# EAGLE board fascia_faceInterfaceV0.1 (EAGLE 9.6.0)
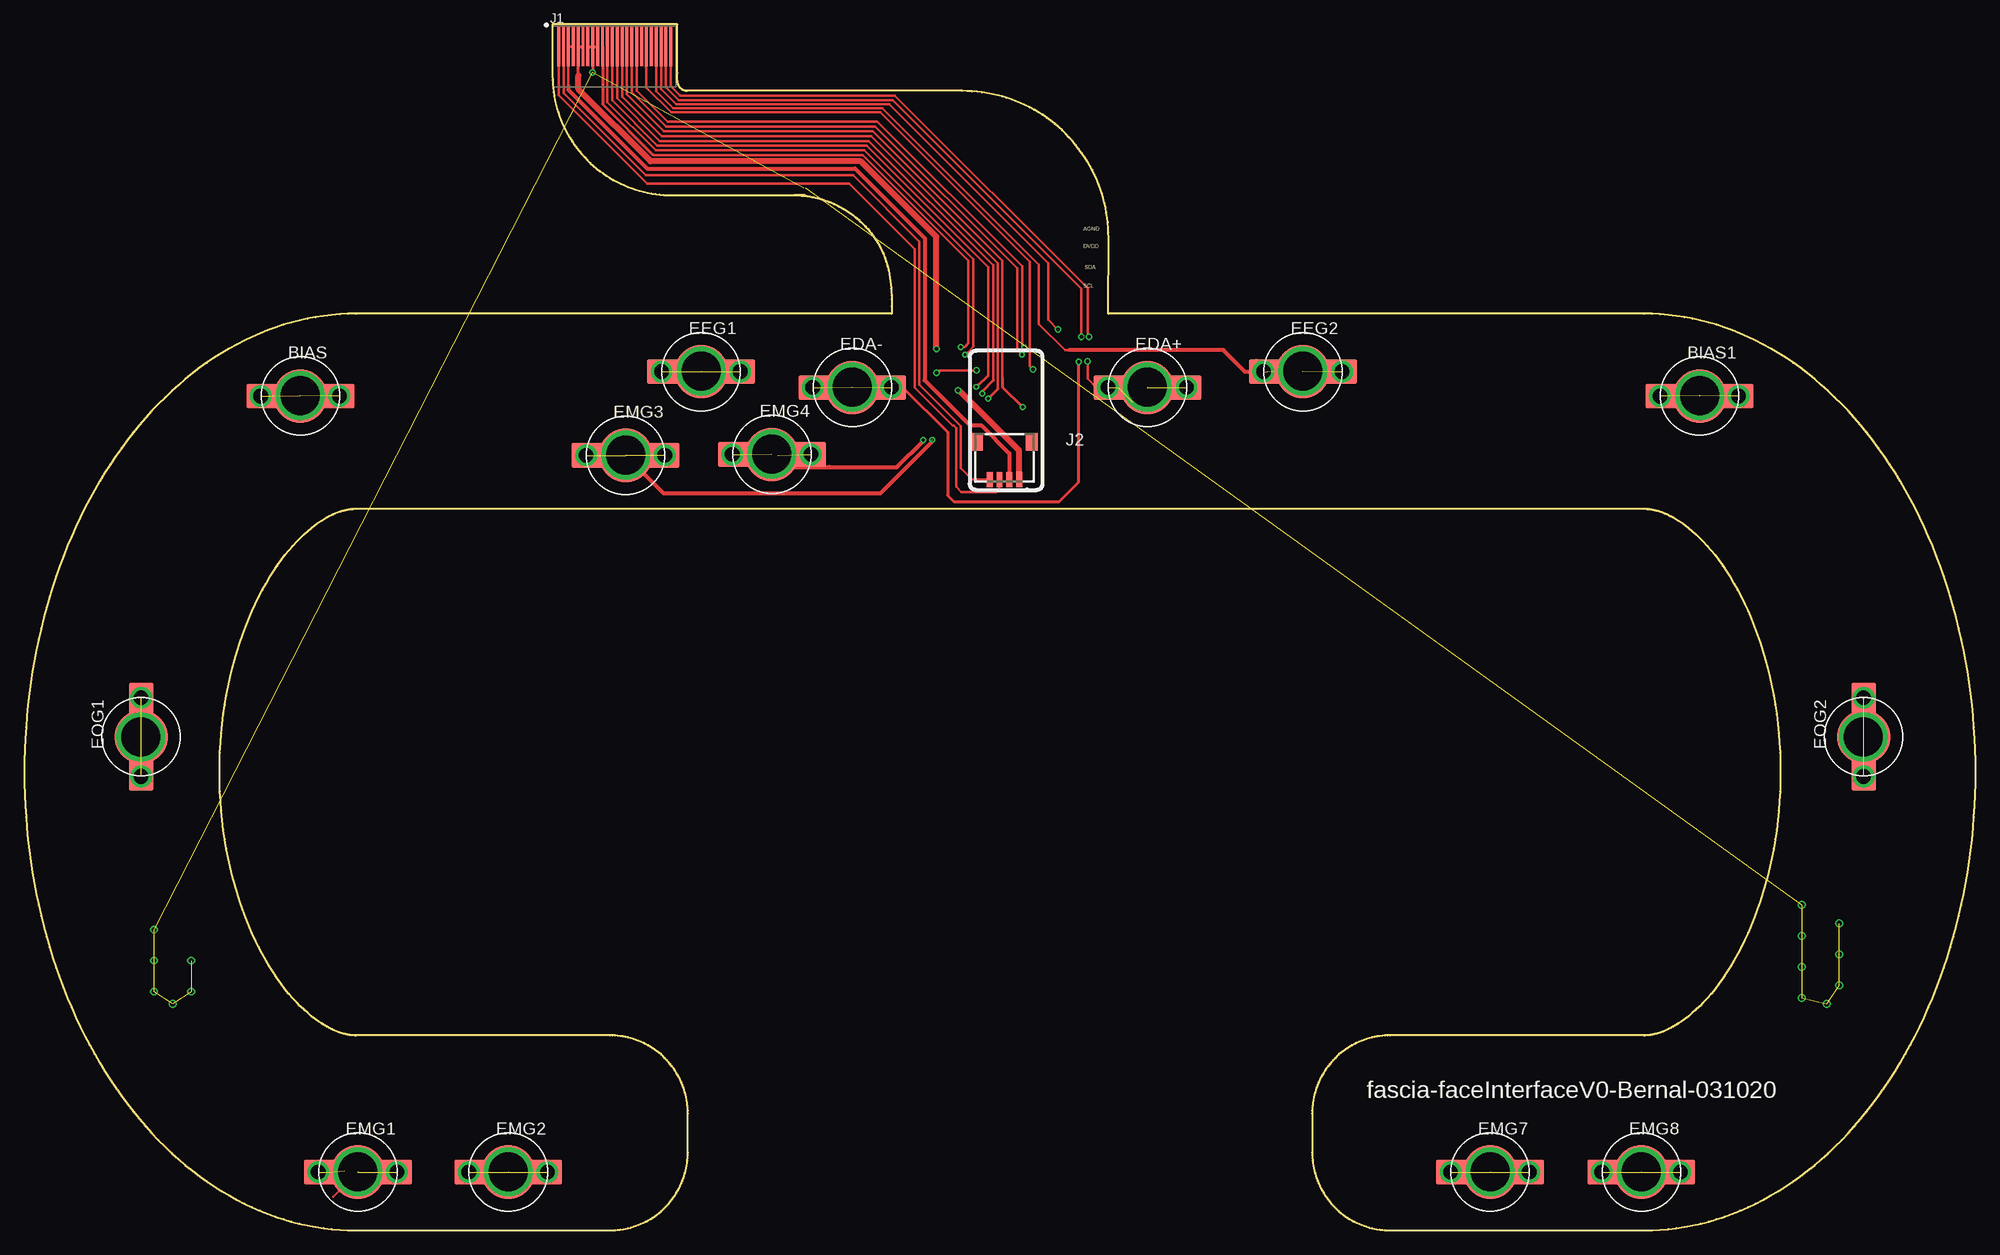
[diagram p0: board, top side]
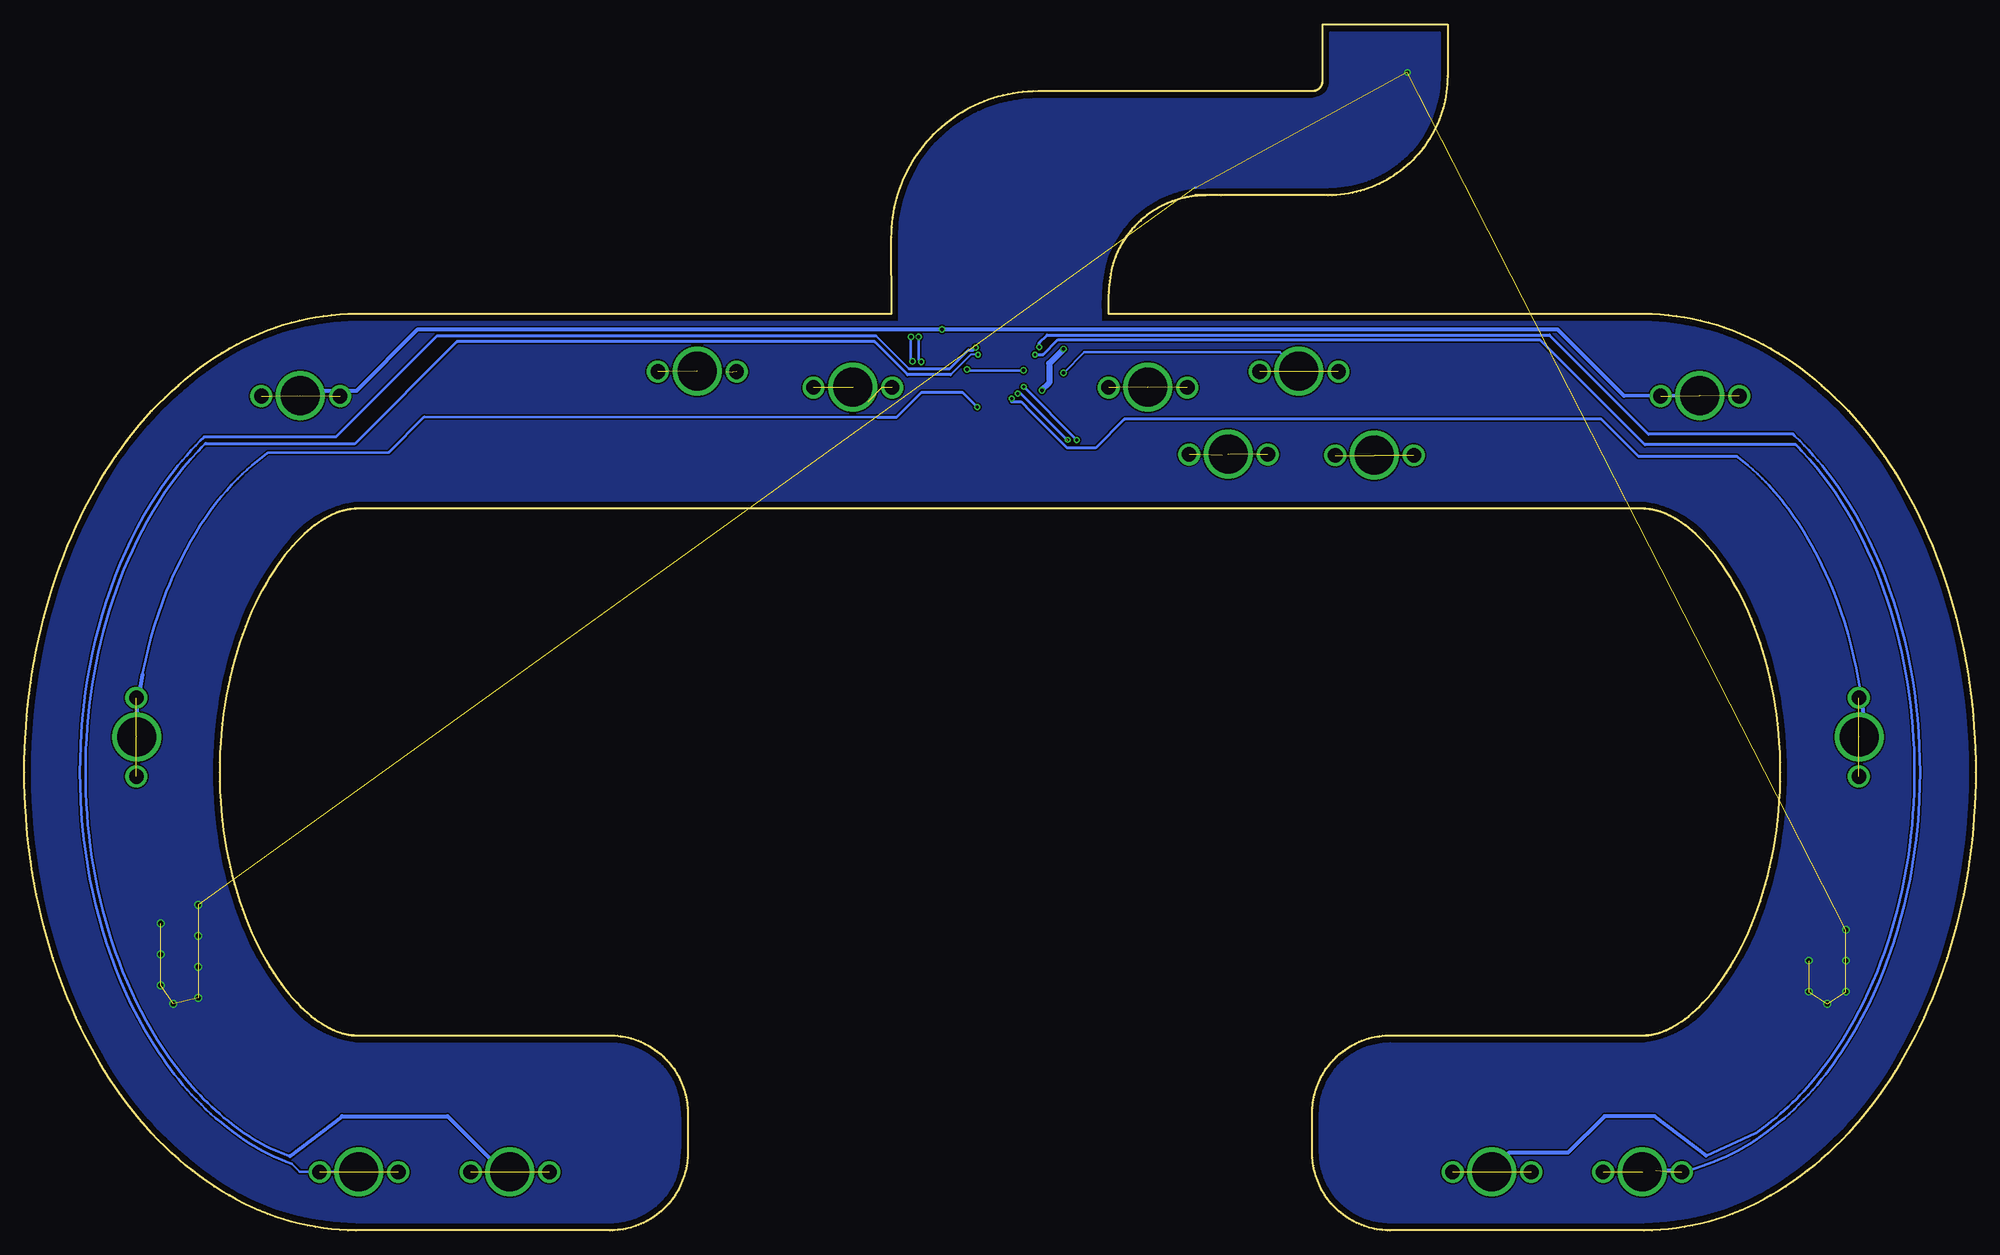
[diagram p1: board, bottom side, seen from below]

Size 200 x 123.67 mm. Coordinates in mm from the lower left corner, seen from the top.
Outline: 78.89,106.14 77.35,106.14 66.37,106.14 65.95,106.15 65.53,106.17 65.12,106.21 64.7,106.26 64.29,106.32 63.88,106.4 63.47,106.49 63.07,106.6 62.67,106.72 62.27,106.85 61.88,107 61.49,107.16 61.11,107.33 60.74,107.52 60.37,107.71 60.01,107.93 59.66,108.15 59.31,108.38 58.97,108.63 58.65,108.89 58.33,109.16 58.02,109.44 57.72,109.73 57.43,110.03 57.15,110.34 56.88,110.66 56.62,110.99 56.37,111.32 56.14,111.67 55.91,112.02 55.7,112.38 55.5,112.75 55.32,113.13 55.14,113.51 54.98,113.89 54.84,114.28 54.7,114.68 54.59,115.08 54.48,115.48 54.39,115.89 54.31,116.3 54.25,116.72 54.2,117.13 54.16,117.55 54.14,117.96 54.13,118.38 54.13,123.67 66.93,123.67 66.93,118.67 66.93,117.86 66.93,117.84 66.94,117.81 66.94,117.79 66.94,117.76 66.94,117.74 66.95,117.72 66.95,117.69 66.95,117.67 66.96,117.64 66.96,117.62 66.97,117.6 66.98,117.57 66.98,117.55 66.99,117.53 67,117.51 67.01,117.48 67.02,117.46 67.03,117.44 67.04,117.42 67.05,117.4 67.06,117.38 67.07,117.36 67.09,117.33 67.1,117.31 67.11,117.29 67.13,117.27 67.14,117.25 67.16,117.23 67.17,117.22 67.19,117.2 67.21,117.18 67.22,117.16 67.24,117.14 67.26,117.12 67.28,117.11 67.3,117.09 67.32,117.07 67.34,117.06 67.36,117.04 67.38,117.03 67.4,117.01 67.42,117 67.44,116.99 67.46,116.98 67.48,116.96 67.5,116.95 67.52,116.94 67.54,116.93 67.57,116.92 67.59,116.91 67.61,116.9 67.64,116.9 67.66,116.89 67.68,116.88 67.71,116.88 67.73,116.87 67.75,116.87 67.78,116.86 67.8,116.86 67.83,116.85 67.85,116.85 67.88,116.85 67.91,116.85 67.93,116.84 96.13,116.84 96.64,116.84 97.15,116.81 97.66,116.77 98.17,116.7 98.68,116.63 99.18,116.53 99.68,116.42 100.18,116.29 100.67,116.14 101.16,115.98 101.64,115.8 102.11,115.6 102.58,115.39 103.04,115.16 103.49,114.91 103.93,114.66 104.37,114.38 104.79,114.09 105.2,113.79 105.61,113.47 106,113.14 106.38,112.8 106.75,112.44 107.1,112.07 107.45,111.69 107.78,111.3 108.09,110.89 108.39,110.48 108.68,110.05 108.96,109.62 109.21,109.18 109.46,108.73 109.68,108.27 109.9,107.8 110.09,107.32 110.27,106.84 110.43,106.36 110.58,105.87 110.71,105.37 110.82,104.87 110.92,104.37 110.99,103.86 111.05,103.35 111.1,102.84 111.12,102.33 111.13,101.81 111.11,94 166,94 166.84,93.99 167.67,93.94 168.51,93.87 169.34,93.77 170.17,93.65 171,93.49 171.82,93.31 172.63,93.1 173.46,92.86 174.27,92.59 175.07,92.29 175.87,91.98 176.67,91.62 177.46,91.25 178.24,90.85 179.01,90.42 179.79,89.96 180.55,89.48 181.3,88.98 182.03,88.45 182.77,87.89 183.49,87.3 184.2,86.7 184.89,86.08 185.59,85.42 186.26,84.74 186.93,84.04 187.57,83.33 188.22,82.58 188.84,81.81 189.45,81.03 190.04,80.23 190.63,79.4 191.2,78.55 191.75,77.69 192.28,76.81 192.81,75.9 193.31,74.98 193.8,74.05 194.27,73.11 194.73,72.13 195.17,71.15 195.58,70.16 195.98,69.15 196.37,68.12 196.74,67.08 197.09,66.04 197.41,64.99 197.72,63.91 198.01,62.83 198.29,61.74 198.54,60.64 198.77,59.53 198.98,58.41 199.17,57.29 199.34,56.17 199.5,55.03 199.63,53.89 199.74,52.75 199.84,51.61 199.91,50.46 199.96,49.31 199.99,48.15 200,47 199.99,45.85 199.96,44.69 199.91,43.54 199.84,42.39 199.74,41.25 199.63,40.11 199.5,38.97 199.34,37.83 199.17,36.71 198.98,35.59 198.77,34.47 198.54,33.36 198.29,32.26 198.01,31.17 197.72,30.09 197.41,29.01 197.09,27.96 196.74,26.92 196.37,25.88 195.98,24.85 195.58,23.84 195.17,22.85 194.73,21.87 194.27,20.89 193.8,19.95 193.31,19.02 192.81,18.1 192.28,17.19 191.75,16.31 191.2,15.45 190.63,14.6 190.04,13.77 189.45,12.97 188.84,12.19 188.22,11.42 187.57,10.67 186.93,9.96 186.26,9.26 185.59,8.58 184.89,7.92 184.2,7.3 183.49,6.7 182.77,6.11 182.03,5.55 181.3,5.02 180.55,4.52 179.79,4.04 179.01,3.58 178.24,3.15 177.46,2.75 176.67,2.38 175.87,2.02 175.07,1.71 174.27,1.41 173.46,1.14 172.63,0.9 171.82,0.69 171,0.51 170.17,0.35 169.34,0.23 168.51,0.13 167.67,0.06 166.84,0.01 166,0 140,0 139.73,0 139.45,0.02 139.18,0.04 138.91,0.07 138.64,0.12 138.37,0.17 138.11,0.23 137.84,0.3 137.58,0.37 137.32,0.46 137.07,0.56 136.81,0.66 136.56,0.78 136.32,0.9 136.08,1.03 135.84,1.16 135.61,1.31 135.39,1.46 135.17,1.63 134.95,1.79 134.74,1.97 134.54,2.15 134.34,2.34 134.15,2.54 133.97,2.74 133.79,2.95 133.63,3.17 133.46,3.39 133.31,3.61 133.16,3.84 133.03,4.08 132.9,4.32 132.78,4.56 132.66,4.81 132.56,5.07 132.46,5.32 132.38,5.58 132.3,5.84 132.23,6.11 132.17,6.37 132.12,6.64 132.07,6.91 132.04,7.18 132.02,7.45 132,7.73 132,8 132,12 132,12.27 132.02,12.55 132.04,12.82 132.07,13.09 132.12,13.36 132.17,13.63 132.23,13.89 132.3,14.16 132.38,14.42 132.46,14.68 132.56,14.93 132.66,15.19 132.78,15.44 132.9,15.68 133.03,15.92 133.16,16.16 133.31,16.39 133.46,16.61 133.63,16.83 133.79,17.05 133.97,17.26 134.15,17.46 134.34,17.66 134.54,17.85 134.74,18.03 134.95,18.21 135.17,18.37 135.39,18.54 135.61,18.69 135.84,18.84 136.08,18.97 136.32,19.1 136.56,19.22 136.81,19.34 137.07,19.44 137.32,19.54 137.58,19.63 137.84,19.7 138.11,19.77 138.37,19.83 138.64,19.88 138.91,19.93 139.18,19.96 139.45,19.98 139.73,20 140,20 166,20 166.1,20 166.2,20 166.3,20.01 166.4,20.02 166.5,20.03 166.6,20.04 166.7,20.05 166.8,20.07 166.91,20.09 167.02,20.11 167.13,20.13 167.24,20.16 167.35,20.19 167.47,20.23 167.6,20.27 167.72,20.31 167.85,20.36 167.99,20.41 168.12,20.46 168.25,20.52 168.39,20.58 168.54,20.65 168.68,20.72 168.83,20.8 169.01,20.9 169.2,21.01 169.37,21.11 169.54,21.22 169.86,21.44 170.04,21.56 170.22,21.7 170.57,21.97 170.95,22.28 171.32,22.61 171.71,22.99 172.09,23.38 172.5,23.81 172.88,24.26 173.29,24.76 173.68,25.27 174.08,25.83 174.46,26.4 174.86,27.02 175.23,27.66 175.61,28.33 175.97,29.02 176.34,29.77 176.69,30.53 177.02,31.29 177.33,32.07 177.64,32.9 177.94,33.75 178.21,34.6 178.46,35.46 178.7,36.36 178.92,37.27 179.12,38.2 179.3,39.14 179.46,40.11 179.6,41.08 179.72,42.05 179.82,43.03 179.9,44.02 179.95,45.01 179.99,46 180,47 179.99,48 179.95,48.99 179.9,49.98 179.82,50.97 179.72,51.96 179.6,52.93 179.46,53.9 179.3,54.86 179.12,55.8 178.92,56.73 178.7,57.64 178.46,58.54 178.2,59.41 177.93,60.28 177.64,61.11 177.33,61.93 177.01,62.72 176.68,63.5 176.33,64.24 175.97,64.98 175.61,65.67 175.23,66.34 174.86,66.98 174.46,67.6 174.08,68.17 173.68,68.73 173.29,69.24 172.88,69.74 172.5,70.19 172.09,70.62 171.71,71.01 171.32,71.39 170.95,71.72 170.57,72.03 170.22,72.3 170.04,72.44 169.86,72.56 169.54,72.78 169.37,72.89 169.2,72.99 169.01,73.1 168.83,73.2 168.69,73.27 168.56,73.34 168.42,73.41 168.28,73.47 168.14,73.53 168,73.59 167.86,73.64 167.72,73.69 167.6,73.73 167.48,73.77 167.36,73.81 167.24,73.84 167.13,73.87 167.02,73.89 166.91,73.91 166.8,73.93 166.7,73.95 166.6,73.96 166.5,73.97 166.4,73.98 166.3,73.99 166.2,74 166.1,74 166,74 34,74 33.9,74 33.8,74 33.7,73.99 33.6,73.98 33.5,73.97 33.4,73.96 33.3,73.95 33.2,73.93 33.09,73.91 32.98,73.89 32.87,73.87 32.76,73.84 32.64,73.8 32.53,73.77 32.4,73.73 32.28,73.69 32.15,73.64 32.02,73.59 31.88,73.54 31.75,73.48 31.61,73.42 31.46,73.35 31.32,73.28 31.18,73.2 30.99,73.1 30.8,72.99 30.63,72.89 30.47,72.78 30.14,72.56 29.96,72.44 29.78,72.3 29.43,72.03 29.05,71.72 28.68,71.39 28.29,71.01 27.91,70.62 27.5,70.19 27.12,69.74 26.71,69.24 26.32,68.73 25.92,68.17 25.54,67.6 25.15,66.98 24.77,66.34 24.39,65.67 24.03,64.98 23.66,64.23 23.31,63.47 22.98,62.71 22.67,61.93 22.36,61.1 22.06,60.25 21.79,59.4 21.54,58.54 21.3,57.64 21.08,56.73 20.88,55.8 20.7,54.86 20.54,53.89 20.4,52.92 20.28,51.95 20.18,50.97 20.1,49.98 20.05,48.99 20.01,48 20,47 20.01,46 20.05,45.01 20.1,44.02 20.18,43.03 20.28,42.04 20.4,41.07 20.54,40.1 20.7,39.14 20.88,38.2 21.08,37.27 21.3,36.36 21.54,35.46 21.8,34.59 22.07,33.72 22.36,32.89 22.67,32.07 22.99,31.28 23.33,30.5 23.67,29.76 24.03,29.02 24.39,28.33 24.77,27.66 25.15,27.02 25.54,26.4 25.92,25.83 26.32,25.27 26.71,24.76 27.12,24.26 27.5,23.81 27.91,23.38 28.29,22.99 28.68,22.61 29.05,22.28 29.43,21.97 29.78,21.7 29.96,21.56 30.14,21.44 30.47,21.22 30.63,21.11 30.8,21.01 30.99,20.9 31.18,20.8 31.31,20.73 31.44,20.66 31.58,20.59 31.72,20.53 31.86,20.47 32,20.41 32.14,20.36 32.28,20.31 32.4,20.27 32.52,20.23 32.64,20.19 32.76,20.16 32.87,20.13 32.98,20.11 33.09,20.09 33.2,20.07 33.3,20.05 33.4,20.04 33.5,20.03 33.6,20.02 33.7,20.01 33.8,20 33.9,20 34,20 60,20 60.27,20 60.55,19.98 60.82,19.96 61.09,19.93 61.36,19.88 61.63,19.83 61.89,19.77 62.16,19.7 62.42,19.63 62.68,19.54 62.94,19.44 63.19,19.34 63.44,19.22 63.68,19.1 63.92,18.97 64.16,18.84 64.39,18.69 64.61,18.54 64.83,18.37 65.05,18.21 65.26,18.03 65.46,17.85 65.66,17.66 65.85,17.46 66.03,17.26 66.21,17.05 66.37,16.83 66.54,16.61 66.69,16.39 66.84,16.16 66.97,15.92 67.1,15.68 67.22,15.44 67.34,15.19 67.44,14.93 67.54,14.68 67.63,14.42 67.7,14.16 67.77,13.89 67.83,13.63 67.88,13.36 67.93,13.09 67.96,12.82 67.98,12.55 68,12.27 68,12 68,8 68,7.73 67.98,7.45 67.96,7.18 67.93,6.91 67.88,6.64 67.83,6.37 67.77,6.11 67.7,5.84 67.63,5.58 67.54,5.32 67.44,5.07 67.34,4.81 67.22,4.56 67.1,4.32 66.97,4.08 66.84,3.84 66.69,3.61 66.54,3.39 66.37,3.17 66.21,2.95 66.03,2.74 65.85,2.54 65.66,2.34 65.46,2.15 65.26,1.97 65.05,1.79 64.83,1.63 64.61,1.46 64.39,1.31 64.16,1.16 63.92,1.03 63.68,0.9 63.44,0.78 63.19,0.66 62.94,0.56 62.68,0.46 62.42,0.37 62.16,0.3 61.89,0.23 61.63,0.17 61.36,0.12 61.09,0.07 60.82,0.04 60.55,0.02 60.27,0 60,0 34,0 33.16,0.01 32.33,0.06 31.49,0.13 30.66,0.23 29.83,0.35 29,0.51 28.18,0.69 27.37,0.9 26.54,1.14 25.73,1.41 24.93,1.71 24.13,2.02 23.33,2.38 22.54,2.75 21.76,3.15 20.99,3.58 20.21,4.04 19.45,4.52 18.71,5.02 17.97,5.55 17.23,6.11 16.51,6.7 15.8,7.3 15.11,7.92 14.41,8.58 13.74,9.26 13.07,9.96 12.43,10.67 11.78,11.42 11.16,12.19 10.55,12.97 9.96,13.77 9.37,14.6 8.8,15.45 8.25,16.31 7.72,17.19 7.19,18.1 6.69,19.02 6.2,19.95 5.73,20.89 5.27,21.87 4.83,22.85 4.42,23.84 4.02,24.85 3.63,25.88 3.26,26.92 2.91,27.96 2.59,29.01 2.28,30.09 1.99,31.17 1.72,32.26 1.47,33.36 1.23,34.47 1.02,35.59 0.83,36.71 0.66,37.83 0.5,38.97 0.37,40.11 0.26,41.25 0.17,42.39 0.09,43.54 0.04,44.69 0.01,45.85 0,47 0.01,48.15 0.04,49.31 0.09,50.46 0.17,51.61 0.26,52.75 0.37,53.89 0.5,55.03 0.66,56.17 0.83,57.29 1.02,58.41 1.23,59.53 1.47,60.64 1.72,61.74 1.99,62.83 2.28,63.91 2.59,64.99 2.91,66.04 3.26,67.08 3.63,68.12 4.02,69.15 4.42,70.16 4.83,71.15 5.27,72.13 5.73,73.11 6.2,74.05 6.69,74.98 7.19,75.9 7.72,76.81 8.25,77.69 8.8,78.55 9.37,79.4 9.96,80.23 10.55,81.03 11.16,81.81 11.78,82.58 12.43,83.33 13.07,84.04 13.74,84.74 14.41,85.42 15.11,86.08 15.8,86.7 16.51,87.3 17.23,87.89 17.97,88.45 18.71,88.98 19.45,89.48 20.21,89.96 20.99,90.42 21.76,90.85 22.54,91.25 23.33,91.62 24.13,91.98 24.93,92.29 25.73,92.59 26.54,92.86 27.37,93.1 28.18,93.31 29,93.49 29.83,93.65 30.66,93.77 31.49,93.87 32.33,93.94 33.16,93.99 34,94 88.89,94 88.9,94.74 88.9,95.49 88.88,95.86 88.87,96.23 88.84,96.61 88.81,96.98 88.76,97.35 88.71,97.72 88.65,98.08 88.58,98.44 88.49,98.8 88.44,98.98 88.39,99.16 88.34,99.34 88.28,99.51 88.22,99.69 88.16,99.86 88.09,100.03 88.02,100.2 87.94,100.37 87.86,100.54 87.78,100.7 87.7,100.87 87.61,101.03 87.52,101.19 87.42,101.35 87.32,101.51 87.22,101.66 87.12,101.82 87.01,101.97 86.9,102.12 86.79,102.27 86.67,102.41 86.55,102.56 86.43,102.7 86.31,102.84 86.18,102.98 86.05,103.11 85.92,103.24 85.79,103.37 85.65,103.5 85.51,103.63 85.37,103.75 85.23,103.87 85.08,103.98 84.93,104.1 84.78,104.21 84.63,104.32 84.48,104.42 84.32,104.53 84.17,104.63 84.01,104.72 83.85,104.82 83.68,104.91 83.52,105 83.35,105.08 83.19,105.16 83.02,105.24 82.85,105.32 82.68,105.39 82.51,105.46 82.33,105.53 82.16,105.59 81.98,105.65 81.81,105.7 81.63,105.76 81.45,105.81 81.27,105.85 81.09,105.9 80.91,105.94 80.73,105.97 80.55,106 80.36,106.03 80.18,106.06 80,106.08 79.81,106.1 79.63,106.12 79.45,106.13 79.26,106.14 79.08,106.14 78.89,106.14
Outline: 78.89,106.14 79.9,106.14 79.92,106.14
Outline: 79.92,106.14 80,106.14
Outline: 80,106.14 80.02,106.14
Outline: 80.02,106.14 80.03,106.14
Outline: 80.03,106.14 80.03,106.14
Outline: 80.03,106.14 80.03,106.14
Outline: 80.03,106.14 80.03,106.14
Outline: 80.03,106.14 80.02,106.14
Outline: 80.02,106.14 80,106.14
Outline: 80,106.14 79.92,106.14
Outline: 79.92,106.14 78.89,106.14
Copper layers (1*16): Top 0.035mm / dielectric 1.5mm / Bottom 0.035mm
Design rules "SparkFun-2-layer-PCBWay-LIMIT": minimum track width 6mil, minimum drill 0.3mm, track to track 6mil, track to pad 6mil, pad to pad 6mil, via to via 6mil, smd to smd 6mil, copper to edge 6mil, drill to drill 6mil, minimum pad ring 6mil, minimum via ring 6mil, stop-mask expansion 4mil, vias tented up to drill 25mil, thermal gap 10mil
Net classes: 0 default: width 0.19 mm, drill 0.19 mm

## Footprints (pad centres in the part's own frame; a part is rotated, then mirrored left to right if it is on the bottom)
ELECTRODE_V2 = drill 4 pad 4.1: , 0,0.04 | smd 5.5 x 5.5: . 0,0 | drill 1.5 pad 1.676: P$1 -4.056,0; P$2 4.009,0 | smd 5.08 x 2.54: P$3 -3,0; P$4 3,0
MOLEX_52437-2471_FLEX = smd 0.3 x 4: 1 0.15,2; 2 0.65,2; 3 1.15,2; 4 1.65,2; 5 2.15,2; 6 2.65,2; 7 3.15,2; 8 3.65,2; 9 4.15,2; 10 4.65,2; 11 5.15,2; 12 5.65,2; 13 6.15,2; 14 6.65,2; 15 7.15,2; 16 7.65,2; 17 8.15,2; 18 8.65,2; 19 9.15,2; 20 9.65,2; 21 10.15,2; 22 10.65,2; 23 11.15,2; 24 11.65,2
SM04B-SRSS-TB(LFSN) = smd 0.6 x 1.55: 1 1.5,4.661; 2 2.5,4.661; 3 3.5,4.661; 4 4.5,4.661 | smd 1.2 x 1.8: 5 0.2,0.786; 6 5.8,0.786

## Placement (x,y rotation side)
BIAS  ELECTRODE-8MMELECTRODE_8MM  [ELECTRODE_V2]  28.28,85.56 0 top
BIAS1  ELECTRODE-8MMELECTRODE_8MM  [ELECTRODE_V2]  171.7,85.56 0 top
EDA+  ELECTRODE-8MMELECTRODE_8MM  [ELECTRODE_V2]  115.11,86.44 0 top
EDA-  ELECTRODE-8MMELECTRODE_8MM  [ELECTRODE_V2]  84.86,86.44 0 top
EEG1  ELECTRODE-8MMELECTRODE_8MM  [ELECTRODE_V2]  69.36,88.06 0 top
EEG2  ELECTRODE-8MMELECTRODE_8MM  [ELECTRODE_V2]  131.05,88.06 0 top
EMG1  ELECTRODE-8MMELECTRODE_8MM  [ELECTRODE_V2]  34.18,5.98 0 top
EMG2  ELECTRODE-8MMELECTRODE_8MM  [ELECTRODE_V2]  49.6,5.98 0 top
EMG3  ELECTRODE-8MMELECTRODE_8MM  [ELECTRODE_V2]  61.63,79.48 0 top
EMG4  ELECTRODE-8MMELECTRODE_8MM  [ELECTRODE_V2]  76.61,79.58 0 top
EMG7  ELECTRODE-8MMELECTRODE_8MM  [ELECTRODE_V2]  150.24,5.98 0 top
EMG8  ELECTRODE-8MMELECTRODE_8MM  [ELECTRODE_V2]  165.73,5.98 0 top
EOG1  ELECTRODE-8MMELECTRODE_8MM  [ELECTRODE_V2]  11.97,50.61 90 top
EOG2  ELECTRODE-8MMELECTRODE_8MM  [ELECTRODE_V2]  188.53,50.61 90 top
J1  MOLEX_52437-247_FLEX  [MOLEX_52437-2471_FLEX]  54.61,119.38 0 top
J2  SM04B-SRSS-TB(LF)(SN)  [SM04B-SRSS-TB(LFSN)]  103.46,81.63 180 top

## Library data of the parts
BIAS BIAS1 EDA+ EDA- EEG1 EEG2 EMG1-EMG4 EMG7 EMG8 EOG1 EOG2 = novaXR
J1 = Molex - 52437-2471
J2 = SamacSys_Parts; DESCRIPTION: JST (JAPAN SOLDERLESS TERMINALS) - SM04B-SRSS-TB(LF)(SN) - CONNECTOR, HEADER, SMT, R/A, 1MM, 4WAY; HEIGHT: mm; MANUFACTURER_NAME: JST (JAPAN SOLDERLESS TERMINALS); MANUFACTURER_PART_NUMBER: SM04B-SRSS-TB(LF)(SN)

## Nets
1N: EMG2., EMG2.. EMG2.P$1 EMG2.P$2 EMG2.P$3 EMG2.P$4 J1.11
1P: EMG1., EMG1.. EMG1.P$1 EMG1.P$2 EMG1.P$3 EMG1.P$4 J1.10
2N: EMG3., EMG3.. EMG3.P$1 EMG3.P$2 EMG3.P$3 EMG3.P$4 J1.13
2P: EMG4., EMG4.. EMG4.P$1 EMG4.P$2 EMG4.P$3 EMG4.P$4 J1.12
3N: EOG2., EOG2.. EOG2.P$1 EOG2.P$2 EOG2.P$3 EOG2.P$4 J1.15
3P: EOG1., EOG1.. EOG1.P$1 EOG1.P$2 EOG1.P$3 EOG1.P$4 J1.14
4N: EMG8., EMG8.. EMG8.P$1 EMG8.P$2 EMG8.P$3 EMG8.P$4 J1.17
4P: EMG7., EMG7.. EMG7.P$1 EMG7.P$2 EMG7.P$3 EMG7.P$4 J1.16
5N: EEG1., EEG1.. EEG1.P$1 EEG1.P$2 EEG1.P$3 EEG1.P$4 J1.19
5P: J1.18
6N: EEG2., EEG2.. EEG2.P$1 EEG2.P$2 EEG2.P$3 EEG2.P$4 J1.21
6P: J1.20
AGND: J1.7 J1.8 J1.9
BIAS: BIAS1., BIAS1.. BIAS1.P$1 BIAS1.P$2 BIAS1.P$3 BIAS1.P$4 BIAS., BIAS.. BIAS.P$1 BIAS.P$2 BIAS.P$3 BIAS.P$4 J1.22
DVDD: J1.3 J1.4 J2.2
EDA+: EDA+., EDA+.. EDA+.P$1 EDA+.P$2 EDA+.P$3 EDA+.P$4 J1.24
EDA-: EDA-., EDA-.. EDA-.P$1 EDA-.P$2 EDA-.P$3 EDA-.P$4 J1.23
GND: J1.5 J1.6 J2.1
S0_I2C_SCL: J1.2 J2.4
S0_I2C_SDA: J1.1 J2.3

## Tracks (layer width: path | path; a pad name or v marks a point on that pad's centre or on a via)
1N  (via drill 0.3)  (5 unrouted)
  Top 0.25: 97.26,95.14 97.26,90.61 96.73,90.08
  Top 0.254: 96.73,90.08 96.46,89.81 v96.41,89.81 | 97.26,95.14 97.26,99.58 86.1,110.74 64.7,110.74 59.76,115.68 J1.11
  Bottom 0.25: 18.35,80.5 18.19,80.34 17.81,79.93 17.06,79.11 16.35,78.27 15.66,77.4 14.99,76.51 14.36,75.6 13.75,74.67 13.17,73.72 12.61,72.76 12.08,71.78 11.57,70.79 11.09,69.79 10.63,68.77 10.2,67.75 9.79,66.72 9.41,65.67 9.04,64.62 8.71,63.56 8.39,62.5 8.1,61.43 7.82,60.35 7.58,59.26 7.35,58.18 7.14,57.08 6.96,55.99 6.8,54.89 6.66,53.78 6.54,52.68 6.44,51.57 6.37,50.46 6.31,49.35 6.28,48.24 6.27,47.13 6.27,46.02 6.3,44.91 6.35,43.8 6.43,42.69 6.52,41.58 6.63,40.47 6.77,39.37 6.92,38.27 7.1,37.17 7.3,36.08 7.52,34.99 7.76,33.91 8.03,32.83 8.32,31.75 8.63,30.69 8.96,29.63 9.32,28.57 9.7,27.53 10.1,26.49 10.53,25.47 10.98,24.45 11.46,23.44 11.96,22.45 12.48,21.47 13.03,20.5 13.61,19.55 14.21,18.62 14.84,17.71 15.5,16.81 16.18,15.94 16.89,15.08 17.63,14.26 18.01,13.85 18.4,13.45 18.8,13.06 19.2,12.68 19.61,12.3 20.02,11.93 20.45,11.57 20.88,11.22 21.29,10.89 21.71,10.58 22.13,10.27 22.56,9.97 22.59,9.95 27.61,7.66
  Bottom 0.305: v96.41,89.81 95.59,89.81 94.06,91.34 44.66,91.34 33.89,80.57 18.43,80.57 18.35,80.5
  Bottom 0.406: 27.61,7.66 32.91,11.72 38.03,11.72 41.76,7.99 47.78,7.99 47.95,7.81 47.95,7.49 EMG2.,
1P  (via drill 0.3)  (5 unrouted)
  Top 0.203: 96.42,90.65 96.34,90.56 v95.97,90.56
  Top 0.25: 96.42,90.65 96.74,90.97 96.74,94.99 96.74,95.14 | 31.64,3.44 EMG1.,
  Top 0.254: 96.74,94.99 96.73,95 | 96.74,95.14 96.74,99.45 85.91,110.28 64.48,110.28
  Top 0.305: J1.10 59.26,115.49 64.48,110.28
  Bottom 0.25: 29.42,6.1 26.83,7.04 26.27,7.27 25.63,7.55 25,7.85 24.38,8.18 23.77,8.52 23.17,8.88 22.58,9.26 22.01,9.65 21.44,10.06 20.79,10.55 20.16,11.06 19.64,11.51 19.12,11.97 18.61,12.44 18.12,12.93 17.64,13.42 17.16,13.92 16.7,14.43 16.25,14.95 15.81,15.48 15.39,16.02 14.97,16.56 14.56,17.12 14.16,17.68 13.77,18.24 13.03,19.4 12.32,20.59 11.65,21.79 11.02,23.02 10.43,24.27 9.88,25.53 9.36,26.8 8.88,28.09 8.44,29.39 8.03,30.7 7.65,32.02 7.31,33.35 7,34.69 6.72,36.03 6.48,37.39 6.27,38.74 6.1,40.1 5.95,41.47 5.84,42.84 5.76,44.21 5.71,45.58 5.69,46.95 5.71,48.32 5.75,49.69 5.83,51.06 5.94,52.42 6.08,53.78 6.26,55.14 6.46,56.49 6.7,57.84 6.97,59.18 7.28,60.52 7.61,61.84 7.99,63.17 8.4,64.49 8.84,65.79 9.32,67.08 9.83,68.36 10.38,69.61 10.96,70.86 11.59,72.08 12.25,73.29 12.96,74.48 13.7,75.65 14.09,76.22 14.49,76.78 14.89,77.34 15.31,77.89 15.74,78.42 16.17,78.96 16.62,79.48 17.08,79.99 17.55,80.49 18.03,80.99 18.53,81.48 18.71,81.64
  Bottom 0.305: 31.97,6.1 32.78,6.1 | 18.71,81.64 33.54,81.64 43.7,91.81 95.18,91.81 95.97,91.02 v95.97,90.56 | 34.06,6.1 EMG1.,
  Bottom 0.406: 29.42,6.1 31.97,6.1 34.06,6.1
2N  (via drill 0.3)  (6 unrouted)
  Top 0.203: 98.14,86 98.2,85.94 v98.2,85.8
  Top 0.25: 99.33,94.3 99.33,87.17
  Top 0.254: J1.13 60.76,116.08 65.12,111.71 86.57,111.71 99.33,98.95 99.33,94.3
  Top 0.305: 99.33,87.17 98.16,86 98.14,86 | 93.11,81.08 93.07,81.08 v93.05,81.06
  Top 0.406: 93.08,80.98 93.12,80.94 87.74,75.56 65.55,75.56 EMG3..
  Bottom 0.203: v98.2,85.8 98.07,85.93 97.99,85.93 | v93.05,81.06 93.13,81.06
  Bottom 0.305: 93.13,81.06 97.99,85.93
2P  (via drill 0.3)  (5 unrouted)
  Top 0.203: 97.63,86.5 v97.58,86.5
  Top 0.25: 98.78,87.65 98.78,95.11 | 92.13,80.95 v92.13,81.03 92.13,80.96
  Top 0.254: 82.51,78.28 77.95,78.28 EMG4., | J1.12 60.26,115.88 64.89,111.25 86.33,111.25 98.78,98.8 98.78,95.11
  Top 0.305: 98.78,87.65 97.63,86.5
  Top 0.406: 77.24,79.48 78.43,78.28 82.51,78.28 89.48,78.28 89.48,78.31 92.13,80.96
  Bottom 0.203: 92.13,81.06 v92.13,81.03
  Bottom 0.305: v97.58,86.5 92.13,81.06
3N  (via drill 0.3)  (5 unrouted)
  Top 0.25: 100.25,95.14 100.25,87.37
  Top 0.254: J1.15 61.76,116.52 65.56,112.72 86.98,112.72 100.25,99.44 100.25,95.14
  Top 0.305: 100.25,87.37 100.25,86.48 v102.32,84.41
  Bottom 0.25: 162.67,79.77 175,79.77 175.08,79.71 175.62,79.32 176.15,78.91 176.67,78.47 177.18,78.03 177.67,77.56 178.16,77.09 178.73,76.49 179.28,75.88 179.81,75.25 180.33,74.61 180.89,73.86 181.43,73.1 181.95,72.32 182.45,71.52 182.95,70.68 183.42,69.82 184.03,68.65 184.41,67.87 184.77,67.09 185.11,66.29 185.44,65.49 185.89,64.32 186.3,63.14 186.68,61.95 187.03,60.75 187.32,59.66 187.58,58.56 187.9,56.99
  Bottom 0.305: 162.67,79.77 159.01,83.43 112.6,83.41 | 112.6,83.41 | 112.6,83.41 110.57,83.41 108.03,85.95 103.86,85.95 v102.32,84.41 | EOG2., 188.59,50.72 188.59,52.17
  Bottom 0.406: 187.9,56.99 188.18,55.41 188.33,54.43 188.46,53.44 188.55,52.62 188.59,52.17
3P  (via drill 0.3)  (5 unrouted)
  Top 0.25: 99.79,86.29 99.79,95.1
  Top 0.254: J1.14 61.26,116.24 65.31,112.19 86.81,112.19 99.79,99.2 99.79,95.1
  Top 0.305: 99.79,86.29 98.81,85.32
  Top 0.406: 98.81,85.32 v98.81,85.29
  Bottom 0.25: 11.64,54.19 11.82,55.41 12.01,56.53 12.23,57.65 12.47,58.77 12.74,59.88 13.07,61.1 13.43,62.31 13.82,63.51 14.25,64.7 14.6,65.6 14.97,66.49 15.36,67.37 15.76,68.24 16.09,68.9 16.43,69.56 16.78,70.21 17.15,70.85 17.64,71.66 18.14,72.46 18.67,73.25 19.23,74.02 19.55,74.45 19.88,74.88 20.22,75.29 20.57,75.71 21.2,76.41 21.52,76.75 21.84,77.09 22.33,77.56 22.82,78.03 23.33,78.47 23.85,78.91 24.38,79.32 24.45,79.37
  Bottom 0.305: 24.45,79.37 34.55,79.37 38.36,83.18 87.25,83.18 90.19,80.25 93.1,80.25 97.34,84.49 97.33,84.49 97.83,84.98 98.81,84.98 v98.81,85.29 | EOG1., 11.82,50.51 11.26,50.51
  Bottom 0.406: 11.26,50.51 11.36,51.74 11.48,52.96 11.64,54.19
4N  (via drill 0.3)  (5 unrouted)
  Top 0.25: v102.48,90.53 102.26,90.75 102.26,94.95 102.26,95.14
  Top 0.254: J1.17 62.76,116.88 65.97,113.67 87.44,113.67 102.26,98.86 102.26,94.95
  Bottom 0.25: 172.6,6.84 173.17,7.04 173.73,7.27 174.37,7.55 175,7.85 175.62,8.18 176.23,8.52 176.83,8.88 177.42,9.26 177.99,9.65 178.56,10.06 179.21,10.55 179.84,11.06 180.37,11.51 180.88,11.97 181.39,12.44 181.88,12.93 182.36,13.42 182.84,13.92 183.3,14.43 183.75,14.95 184.19,15.48 184.62,16.02 185.03,16.56 185.44,17.12 185.84,17.68 186.23,18.24 186.97,19.4 187.68,20.59 188.35,21.79 188.98,23.02 189.57,24.27 190.12,25.53 190.64,26.8 191.12,28.09 191.56,29.39 191.97,30.7 192.35,32.02 192.69,33.35 193,34.69 193.28,36.03 193.52,37.39 193.73,38.74 193.9,40.1 194.05,41.47 194.16,42.84 194.24,44.21 194.29,45.58 194.31,46.95 194.29,48.32 194.25,49.69 194.17,51.06 194.06,52.42 193.92,53.78 193.74,55.14 193.54,56.49 193.3,57.84 193.03,59.18 192.73,60.52 192.39,61.84 192.01,63.17 191.61,64.49 191.16,65.79 190.68,67.08 190.17,68.36 189.62,69.61 189.04,70.86 188.41,72.08 187.75,73.29 187.04,74.48 186.3,75.65 185.91,76.22 185.51,76.78 185.11,77.34 184.69,77.89 184.26,78.42 183.83,78.96 183.38,79.48 182.92,79.99 182.45,80.49 181.97,80.99 181.58,81.37 | 112.71,91.72 109.35,88.37
  Bottom 0.254: EMG8., 171.79,6.02 172.6,6.84
  Bottom 0.305: 112.71,91.72 157.73,91.72 168.08,81.37 181.58,81.37 | v102.48,90.53 102.74,90.27 103.25,90.27 105.15,88.37 109.35,88.37
4P  (via drill 0.3)  (5 unrouted)
  Top 0.203: 102.21,89.82 102.25,89.87 v102.25,89.8 | 101.72,95.03 101.76,94.99
  Top 0.25: 101.76,95.14 101.76,94.99 101.76,90.27 102.21,89.82
  Top 0.254: J1.16 62.26,116.71 65.77,113.2 87.21,113.2 101.76,98.65 101.76,94.99
  Bottom 0.203: 105.07,87.74 103.01,89.8 v102.25,89.8
  Bottom 0.25: 181.42,80.72 181.51,80.64 181.81,80.34 182.19,79.93 182.94,79.11 183.65,78.27 184.34,77.4 185.01,76.51 185.64,75.6 186.25,74.67 186.83,73.72 187.39,72.76 187.92,71.78 188.43,70.79 188.91,69.79 189.37,68.77 189.8,67.75 190.21,66.72 190.59,65.67 190.96,64.62 191.3,63.56 191.61,62.5 191.9,61.43 192.18,60.35 192.42,59.26 192.65,58.18 192.86,57.08 193.04,55.99 193.2,54.89 193.34,53.78 193.46,52.68 193.56,51.57 193.63,50.46 193.69,49.35 193.72,48.24 193.73,47.13 193.73,46.02 193.7,44.91 193.65,43.8 193.58,42.69 193.48,41.58 193.37,40.47 193.23,39.37 193.08,38.27 192.81,36.62 192.48,34.99 192.24,33.91 191.97,32.83 191.68,31.75 191.37,30.69 191.04,29.63 190.68,28.57 190.3,27.53 189.9,26.49 189.47,25.47 189.02,24.45 188.54,23.44 188.04,22.45 187.52,21.47 186.97,20.5 186.39,19.55 185.79,18.62 185.16,17.71 184.5,16.81 183.82,15.94 183.11,15.08 182.37,14.26 181.99,13.85 181.6,13.45 181.2,13.06 180.8,12.68 180.39,12.3 179.98,11.93 179.55,11.57 179.12,11.22 178.71,10.89 178.3,10.58 177.87,10.27 177.44,9.97 177.01,9.68 176.57,9.4 176.12,9.12 175.67,8.86 175.22,8.61 174.81,8.4 172.79,7.61
  Bottom 0.305: EMG7., 150.93,6.02 | 105.07,87.74 109.46,87.74 112.84,91.12 155.68,91.12 166.16,80.64 181.51,80.64
  Bottom 0.406: 172.79,7.61 167.42,11.72 156.63,11.72 150.93,6.02
5N  (via drill 0.35)  (5 unrouted)
  Top 0.254: v93.49,87.92 93.75,88.19 v97.6,88.19 | v103.38,88.29 103.07,88.6 103.07,99.33 87.75,114.65 66.31,114.65 63.76,117.2 J1.19
  Bottom 0.254: EEG1., 71.32,90.06 91.35,90.06 v93.49,87.92 | v97.6,88.19 103.27,88.19 v103.38,88.29
6N  (5 unrouted)
  Top 0.254: J1.21 64.76,116.83 66.52,115.07 87.95,115.07 103.99,99.03 103.99,92.95 106.67,90.27 107.15,90.27
  Top 0.305: EEG2.. 127.38,88.06 126.29,89.14
  Top 0.406: 107.15,90.27 122.88,90.27 125.12,88.04 127.4,88.04 | 127.63,87.8 127.4,88.04 | 127.4,88.04 126.29,89.14
AGND  (via drill 0.35, 0.5)  (15 unrouted)
  Top 0.305: J1.7 J1.8 | J1.8 J1.9 | J1.8 58.26,118.75 v58.25,118.74
  Bottom 0.2: 80.03,106.94 79.9,106.94
  other vias: 186.01,31.47 186.01,28.29 186.01,25.12 184.74,23.21 182.2,23.85 182.2,27.02 182.2,30.2 182.2,33.37 17.1,27.66 17.1,24.48 15.19,23.21 13.29,24.48 13.29,27.66 13.29,30.83
  pour Bottom: 0.82,48.46 0.8,47 0.82,45.54 0.87,44.09 0.95,42.64 1.07,41.18 1.22,39.74 1.4,38.3 1.62,36.86 1.87,35.43 2.15,34 2.46,32.58 2.81,31.16 3.2,29.75 3.62,28.35 4.08,26.97 4.58,25.6 5.12,24.24 5.69,22.9 6.3,21.57 6.94,20.26 7.62,18.97 8.34,17.69 8.84,16.84 9.23,16.21 9.63,15.59 10.05,14.98 10.47,14.38 10.9,13.79 11.35,13.2 11.81,12.63 12.27,12.06 12.75,11.51 13.24,10.96 13.74,10.42 14.26,9.9 14.78,9.38 15.31,8.87 15.86,8.37 16.41,7.88 16.98,7.4 17.55,6.94 18.14,6.47 18.73,6.02 19.35,5.58 19.97,5.15 20.6,4.75 21.24,4.36 21.89,3.99 22.55,3.63 23.21,3.31 23.88,3 24.55,2.71 25.24,2.44 25.93,2.19 26.63,1.96 27.34,1.75 28.05,1.57 28.77,1.4 29.5,1.25 30.23,1.13 30.97,1.02 31.72,0.93 32.48,0.87 33.24,0.82 33.99,0.8 34.01,0.8 59.99,0.8 60.25,0.8 60.27,0.81 60.49,0.82 60.51,0.82 60.74,0.84 60.98,0.87 61.22,0.9 61.46,0.95 61.68,1 61.7,1 61.72,1.01 61.94,1.07 61.96,1.07 62.18,1.14 62.41,1.22 62.62,1.29 62.64,1.3 62.87,1.4 63.09,1.5 63.11,1.51 63.31,1.61 63.53,1.72 63.55,1.73 63.74,1.85 63.93,1.97 63.95,1.98 64.15,2.12 64.17,2.13 64.35,2.26 64.54,2.41 64.72,2.56 64.73,2.57 64.91,2.74 65.09,2.91 65.26,3.09 65.41,3.25 65.43,3.27 65.57,3.44 65.59,3.46 65.74,3.65 65.75,3.67 65.88,3.85 66.02,4.05 66.15,4.26 66.28,4.47 66.38,4.67 66.39,4.69 66.5,4.91 66.6,5.13 66.7,5.36 66.78,5.59 66.86,5.82 66.93,6.06 67,6.3 67,6.32 67.05,6.54 67.1,6.78 67.1,6.8 67.13,7.02 67.16,7.24 67.16,7.26 67.16,7.28 67.18,7.51 67.2,7.75 67.2,8.01 67.2,11.99 67.2,12.25 67.18,12.49 67.16,12.72 67.16,12.74 67.13,12.98 67.1,13.2 67.1,13.22 67.05,13.46 67,13.7 66.93,13.94 66.86,14.18 66.79,14.39 66.78,14.41 66.78,14.43 66.7,14.64 66.61,14.85 66.6,14.87 66.5,15.09 66.49,15.11 66.39,15.31 66.28,15.53 66.16,15.72 66.15,15.74 66.03,15.93 66.02,15.95 65.89,16.14 65.88,16.15 65.75,16.33 65.74,16.35 65.59,16.54 65.57,16.56 65.43,16.73 65.41,16.75 65.26,16.91 65.11,17.08 65.09,17.09 64.91,17.26 64.75,17.41 64.73,17.43 64.54,17.59 64.35,17.74 64.17,17.87 64.15,17.88 63.97,18.01 63.95,18.02 63.74,18.15 63.53,18.28 63.31,18.39 63.09,18.5 62.89,18.6 62.87,18.6 62.64,18.7 62.43,18.78 62.41,18.78 62.39,18.79 62.18,18.86 62.16,18.87 61.94,18.93 61.72,18.99 61.7,19 61.48,19.04 61.46,19.05 61.22,19.1 61,19.13 60.98,19.13 60.74,19.16 60.49,19.18 60.25,19.2 60.23,19.2 60,19.2 59.99,19.2 34.06,19.2 33.63,19.26 33.42,19.3 33.21,19.34 32.99,19.39 32.78,19.43 32.57,19.49 32.36,19.54 32.16,19.6 31.95,19.67 31.75,19.74 31.55,19.81 31.35,19.88 31.15,19.97 30.96,20.05 30.76,20.14 30.57,20.23 30.38,20.33 30.2,20.43 30.01,20.53 29.83,20.64 29.65,20.75 29.47,20.86 29.3,20.98 29.12,21.11 28.95,21.24 28.78,21.37 28.61,21.5 28.44,21.64 28.28,21.79 28.12,21.93 27.96,22.08 27.8,22.24 27.65,22.4 27.49,22.56 27.27,22.82 26.98,23.14 26.37,23.89 25.79,24.65 25.24,25.42 24.72,26.2 24.22,27 23.75,27.82 23.31,28.65 22.9,29.49 22.51,30.35 22.14,31.22 21.8,32.11 21.48,33 21.18,33.89 20.9,34.79 20.65,35.7 20.41,36.62 20.2,37.55 20.01,38.48 19.84,39.42 19.69,40.36 19.56,41.3 19.45,42.25 19.36,43.2 19.29,44.15 19.24,45.1 19.21,46.05 19.2,47 19.21,47.95 19.24,48.9 19.29,49.85 19.36,50.8 19.45,51.75 19.56,52.7 19.69,53.64 19.84,54.58 20.01,55.52 20.2,56.45 20.41,57.38 20.65,58.3 20.9,59.2 21.18,60.11 21.48,61 21.8,61.89 22.14,62.78 22.51,63.65 22.9,64.51 23.31,65.35 23.75,66.18 24.22,67 24.72,67.8 25.24,68.58 25.79,69.35 26.37,70.11 26.98,70.86 27.34,71.27 27.49,71.44 27.65,71.6 27.8,71.76 27.96,71.92 28.12,72.07 28.28,72.21 28.44,72.36 28.61,72.5 28.78,72.63 28.95,72.76 29.12,72.89 29.3,73.02 29.47,73.14 29.65,73.25 29.83,73.36 30.01,73.47 30.2,73.57 30.38,73.67 30.57,73.77 30.76,73.86 30.96,73.95 31.15,74.03 31.35,74.11 31.55,74.19 31.75,74.26 31.95,74.33 32.16,74.4 32.36,74.46 32.57,74.51 32.78,74.57 32.99,74.61 33.21,74.66 33.42,74.7 33.63,74.74 34.06,74.8 165.94,74.8 166.37,74.74 166.58,74.7 166.79,74.66 167.01,74.61 167.22,74.57 167.43,74.51 167.64,74.46 167.84,74.4 168.05,74.33 168.25,74.26 168.45,74.19 168.65,74.12 168.85,74.03 169.04,73.95 169.24,73.86 169.43,73.77 169.62,73.67 169.8,73.57 169.99,73.47 170.17,73.36 170.35,73.25 170.53,73.14 170.7,73.02 170.88,72.89 171.05,72.76 171.22,72.63 171.39,72.5 171.56,72.36 171.72,72.21 171.88,72.07 172.04,71.92 172.2,71.76 172.35,71.6 172.51,71.44 172.73,71.18 173.02,70.86 173.63,70.11 174.21,69.35 174.76,68.58 175.28,67.8 175.78,67 176.25,66.18 176.69,65.35 177.1,64.51 177.49,63.65 177.86,62.78 178.2,61.89 178.52,61 178.82,60.11 179.1,59.21 179.35,58.3 179.59,57.38 179.8,56.45 179.99,55.52 180.16,54.58 180.31,53.64 180.44,52.7 180.55,51.75 180.64,50.8 180.71,49.85 180.76,48.9 180.79,47.95 180.8,47 180.79,46.05 180.76,45.1 180.71,44.15 180.64,43.2 180.55,42.25 180.44,41.3 180.31,40.36 180.16,39.42 179.99,38.48 179.8,37.55 179.59,36.62 179.35,35.7 179.1,34.79 178.82,33.89 178.52,33 178.2,32.11 177.86,31.22 177.49,30.35 177.1,29.49 176.69,28.65 176.25,27.82 175.78,27 175.28,26.2 174.76,25.42 174.21,24.65 173.63,23.89 173.02,23.14 172.66,22.73 172.51,22.56 172.35,22.4 172.2,22.24 172.04,22.08 171.88,21.93 171.72,21.79 171.56,21.64 171.39,21.5 171.22,21.37 171.05,21.24 170.88,21.11 170.7,20.98 170.53,20.86 170.35,20.75 170.17,20.64 169.99,20.53 169.8,20.43 169.62,20.33 169.43,20.23 169.24,20.14 169.04,20.05 168.85,19.97 168.65,19.89 168.45,19.81 168.25,19.74 168.05,19.67 167.84,19.6 167.64,19.54 167.43,19.49 167.22,19.43 167.01,19.39 166.79,19.34 166.58,19.3 166.36,19.26 165.93,19.2 140.02,19.2 139.83,19.2 139.64,19.19 139.45,19.18 139.27,19.16 139.08,19.14 138.9,19.11 138.71,19.08 138.53,19.05 138.34,19.01 138.16,18.96 137.98,18.91 137.81,18.86 137.63,18.8 137.45,18.73 137.28,18.66 137.11,18.59 136.93,18.51 136.76,18.43 136.6,18.34 136.43,18.25 136.27,18.15 136.11,18.06 135.95,17.95 135.8,17.85 135.65,17.74 135.5,17.62 135.36,17.5 135.22,17.38 135.08,17.25 134.94,17.12 134.81,16.99 134.68,16.86 134.56,16.71 134.44,16.57 134.32,16.42 134.2,16.27 134.09,16.12 133.98,15.96 133.88,15.8 133.78,15.64 133.69,15.47 133.6,15.31 133.51,15.14 133.44,14.96 133.36,14.79 133.29,14.61 133.23,14.44 133.17,14.26 133.12,14.07 133.07,13.89 133.03,13.71 132.99,13.52 132.96,13.33 132.93,13.15 132.91,12.94 132.88,12.61 132.83,11.96 132.79,11.31 132.77,10.65 132.76,10 132.77,9.35 132.79,8.69 132.83,8.04 132.91,7.06 132.93,6.85 132.96,6.67 132.99,6.48 133.03,6.29 133.07,6.11 133.12,5.93 133.17,5.74 133.23,5.56 133.29,5.39 133.36,5.21 133.44,5.04 133.51,4.86 133.6,4.69 133.69,4.53 133.78,4.36 133.88,4.2 133.98,4.04 134.09,3.88 134.2,3.73 134.32,3.58 134.44,3.43 134.56,3.29 134.68,3.14 134.81,3.01 134.94,2.88 135.08,2.75 135.22,2.62 135.36,2.5 135.5,2.38 135.65,2.26 135.8,2.15 135.95,2.05 136.11,1.94 136.27,1.85 136.43,1.75 136.6,1.66 136.76,1.57 136.93,1.49 137.11,1.41 137.28,1.34 137.45,1.27 137.63,1.2 137.8,1.14 137.98,1.09 138.16,1.04 138.34,0.99 138.53,0.95 138.71,0.92 138.9,0.89 139.08,0.86 139.27,0.84 139.45,0.82 139.64,0.81 139.83,0.8 140.02,0.8 165.99,0.8 166.01,0.8 166.76,0.82 167.52,0.87 168.28,0.93 169.03,1.02 169.77,1.13 170.5,1.25 171.23,1.4 171.95,1.57 172.66,1.75 173.37,1.96 174.07,2.19 174.76,2.44 175.45,2.71 176.12,3 176.79,3.31 177.45,3.63 178.11,3.99 178.76,4.36 179.4,4.75 180.03,5.15 180.65,5.58 181.27,6.02 181.86,6.47 182.45,6.94 183.02,7.4 183.59,7.88 184.14,8.37 184.69,8.87 185.22,9.38 185.74,9.9 186.26,10.42 186.76,10.96 187.25,11.51 187.73,12.06 188.19,12.63 188.65,13.2 189.1,13.79 189.53,14.38 189.95,14.98 190.37,15.59 190.77,16.21 191.16,16.84 191.66,17.69 192.38,18.97 193.06,20.26 193.7,21.57 194.31,22.9 194.88,24.24 195.42,25.6 195.92,26.97 196.38,28.35 196.8,29.75 197.19,31.16 197.54,32.58 197.85,34 198.13,35.43 198.38,36.86 198.6,38.3 198.78,39.74 198.93,41.18 199.05,42.64 199.13,44.09 199.18,45.54 199.2,47 199.18,48.46 199.13,49.91 199.05,51.36 198.93,52.82 198.78,54.26 198.6,55.7 198.38,57.14 198.13,58.57 197.85,60 197.54,61.42 197.19,62.84 196.8,64.25 196.38,65.65 195.92,67.03 195.42,68.4 194.88,69.76 194.31,71.1 193.7,72.43 193.06,73.74 192.38,75.03 191.66,76.31 191.16,77.16 190.77,77.79 190.37,78.41 189.95,79.02 189.53,79.62 189.1,80.21 188.65,80.8 188.19,81.37 187.73,81.94 187.25,82.49 186.76,83.04 186.26,83.58 185.74,84.1 185.22,84.62 184.69,85.13 184.14,85.63 183.59,86.12 183.02,86.6 182.45,87.06 181.86,87.53 181.27,87.98 180.65,88.42 180.03,88.85 179.4,89.25 178.76,89.64 178.11,90.01 177.45,90.37 176.79,90.69 176.12,91 175.45,91.29 174.76,91.56 174.07,91.81 173.37,92.04 172.66,92.25 171.95,92.43 171.23,92.6 170.5,92.75 169.77,92.87 169.03,92.98 168.28,93.07 167.52,93.13 166.76,93.18 166.01,93.2 165.99,93.2 111.11,93.2 110.31,93.2 110.33,101.81 110.32,102.3 110.3,102.78 110.26,103.27 110.2,103.75 110.13,104.23 110.04,104.71 109.93,105.18 109.81,105.65 109.67,106.12 109.52,106.58 109.35,107.03 109.16,107.48 108.96,107.92 108.75,108.36 108.52,108.79 108.27,109.21 108.01,109.62 107.74,110.02 107.45,110.41 107.15,110.79 106.84,111.16 106.52,111.53 106.18,111.87 105.83,112.21 105.47,112.54 105.1,112.85 104.72,113.15 104.33,113.44 103.93,113.71 103.52,113.97 103.1,114.22 102.67,114.45 102.23,114.66 101.79,114.87 101.34,115.05 100.89,115.22 100.43,115.38 99.96,115.52 99.49,115.64 99.02,115.75 98.54,115.84 98.06,115.91 97.58,115.97 97.1,116.01 96.61,116.04 96.13,116.04 67.99,116.04 67.83,116.07 67.68,116.11 67.55,116.14 67.48,116.16 67.42,116.18 67.36,116.19 67.31,116.21 67.26,116.23 67.2,116.25 67.16,116.27 67.12,116.29 67.09,116.3 67.05,116.32 67.02,116.34 66.99,116.35 66.96,116.37 66.93,116.39 66.9,116.41 66.87,116.42 66.82,116.46 66.77,116.5 66.72,116.53 66.69,116.56 66.67,116.57 66.65,116.59 66.64,116.6 66.63,116.61 66.62,116.62 66.61,116.63 66.6,116.64 66.59,116.65 66.58,116.66 66.57,116.67 66.55,116.69 66.54,116.71 66.52,116.74 66.48,116.8 66.45,116.85 66.4,116.92 66.37,116.97 66.34,117.03 66.33,117.06 66.31,117.09 66.29,117.12 66.28,117.16 66.27,117.19 66.25,117.22 66.24,117.26 66.23,117.29 66.22,117.32 66.21,117.36 66.2,117.39 66.19,117.43 66.18,117.46 66.17,117.49 66.17,117.53 66.16,117.56 66.15,117.6 66.15,117.64 66.14,117.67 66.14,117.71 66.14,117.75 66.14,117.78 66.13,117.82 66.13,118.67 66.13,122.87 54.93,122.87 54.93,118.38 54.94,117.98 54.96,117.58 54.99,117.19 55.04,116.79 55.1,116.4 55.18,116 55.27,115.61 55.37,115.23 55.49,114.85 55.62,114.47 55.76,114.1 55.92,113.73 56.09,113.37 56.27,113.01 56.46,112.66 56.67,112.32 56.89,111.99 57.12,111.66 57.36,111.34 57.61,111.03 57.87,110.73 58.14,110.44 58.42,110.15 58.72,109.88 59.02,109.62 59.33,109.37 59.65,109.13 59.97,108.9 60.31,108.68 60.65,108.48 61,108.28 61.36,108.1 61.72,107.93 62.08,107.78 62.46,107.63 62.83,107.5 63.22,107.39 63.6,107.28 63.99,107.19 64.38,107.12 64.78,107.06 65.17,107.01 65.57,106.97 65.97,106.95 66.37,106.94 77.35,106.94 79.9,106.94 78.89,106.94 79.18,106.94 79.46,106.93 79.74,106.91 80.03,106.88 80.31,106.85 80.59,106.81 80.87,106.76 81.15,106.7 81.36,106.65 81.57,106.6 81.78,106.54 81.99,106.48 82.2,106.42 82.41,106.35 82.62,106.27 82.82,106.19 83.09,106.09 83.35,105.97 83.6,105.85 83.86,105.72 84.03,105.63 84.21,105.53 84.38,105.44 84.55,105.33 84.79,105.18 85.03,105.02 85.26,104.85 85.49,104.68 85.71,104.5 85.93,104.32 86.15,104.13 86.36,103.94 86.56,103.73 86.76,103.53 86.95,103.32 87.14,103.1 87.32,102.88 87.5,102.65 87.67,102.42 87.83,102.19 87.99,101.95 88.14,101.71 88.29,101.46 88.42,101.21 88.54,100.97 88.66,100.73 88.77,100.49 88.87,100.24 88.98,99.93 89.09,99.63 89.17,99.36 89.24,99.1 89.31,98.84 89.37,98.57 89.43,98.27 89.48,97.97 89.53,97.66 89.57,97.36 89.6,97.06 89.63,96.76 89.67,96.16 89.69,95.61 89.7,95.06 89.69,93.98 89.67,93.2 88.89,93.2 34.01,93.2 33.99,93.2 33.24,93.18 32.48,93.13 31.72,93.07 30.97,92.98 30.23,92.87 29.5,92.75 28.77,92.6 28.05,92.43 27.34,92.25 26.63,92.04 25.93,91.81 25.24,91.56 24.55,91.29 23.88,91 23.21,90.69 22.55,90.37 21.89,90.01 21.24,89.64 20.6,89.25 19.97,88.85 19.35,88.42 18.73,87.98 18.14,87.53 17.55,87.06 16.98,86.6 16.41,86.12 15.86,85.63 15.31,85.13 14.78,84.62 14.26,84.1 13.74,83.58 13.24,83.04 12.75,82.49 12.27,81.94 11.81,81.37 11.35,80.8 10.9,80.21 10.47,79.62 10.05,79.02 9.63,78.41 9.23,77.79 8.84,77.16 8.34,76.31 7.62,75.03 6.94,73.74 6.3,72.43 5.69,71.1 5.12,69.76 4.58,68.4 4.08,67.03 3.62,65.65 3.2,64.25 2.81,62.84 2.46,61.42 2.15,60 1.87,58.57 1.62,57.14 1.4,55.7 1.22,54.26 1.07,52.82 0.95,51.36 0.87,49.91
BIAS  (via drill 0.35)  (10 unrouted)
  Top 0.254: J1.22 65.26,117.02 66.79,115.48 88.65,115.48 104.94,99.19 104.94,93.37 105.93,92.38 v105.93,92.4
  Bottom 0.406: BIAS., 36.02,85.56 42.88,92.41 94.71,92.41 94.73,92.4 v105.93,92.4 159.67,92.4 165.96,86.11 171.15,86.11 BIAS1.,
DVDD
  Top 0.254: J1.4 J1.3 55.76,117.38 55.77,117.38
  Top 0.406: 55.77,117.38 55.77,116.96 63.83,108.89 85.15,108.89 92.28,101.76 92.28,87.19 96.92,82.55 98.08,82.55 100.96,79.68 J2.2
EDA+  (via drill 0.35)  (5 unrouted)
  Top 0.25: EDA+., 113.55,84.93
  Top 0.254: J1.24 66.26,117.33 67.23,116.36 89.23,116.36 108.97,96.61 108.97,91.79 v109.14,91.62 | EDA+.P$3 109.88,86.44 108.99,87.33 v108.99,89.12
  Bottom 0.254: v108.99,89.12 109.14,89.28 v109.14,91.62
EDA-  (via drill 0.35)  (5 unrouted)
  Top 0.254: J1.23 65.76,117.22 67.09,115.89 89.02,115.89 108.33,96.58 v108.33,91.62
  Top 0.305: EDA-.. 90.04,86.44 94.64,81.85 94.64,75.36 95.27,74.73 106.07,74.73 108.07,76.73 v108.07,89.05
  Bottom 0.254: v108.33,91.62 108.33,89.31 v108.07,89.05
GND  (via drill 0.35)
  Top 0.305: 56.8,118.41 56.8,121.35 J1.5 J1.6
  Top 0.61: v95.71,86.16 95.76,86.16 101.96,79.96 J2.1 | 56.8,118.41 56.8,117.03 64.19,109.64 85.73,109.64 93.49,101.88 v93.49,90.37
  Bottom 0.61: v93.49,90.37 94.97,88.9 94.97,86.9 v95.71,86.16
S0_I2C_SCL
  Top 0.254: J2.4 97.18,76.97 95.98,78.16 95.98,82.47 91.74,86.71 91.74,101.4 84.96,108.18 63.7,108.18 55.26,116.63 J1.2
S0_I2C_SDA
  Top 0.254: J1.1 54.76,116.4 63.83,107.32 84.55,107.32 91.26,100.62 91.26,86.44 95.18,82.52 95.25,82.52 95.51,82.26 95.51,76.25 96.04,75.72 99.63,75.72 99.94,76.04 99.94,76.96 J2.3

## Text on the board
tNames: AGND | DVDD | SDA | SCL | fascia-faceInterfaceV0-Bernal-031020
bStiffener: stiffener BOT